# Altium PCB PCB_2020-05-19_10-20-51_2022-02-26.pcbdoc
Units mil, origin at the board's own origin, x right, y up, seen from the top; angles counter-clockwise.
Board outline 6480 x 5240 mil, 2 copper layers (Top Layer, Bottom Layer); 39 components, 37 nets, 137 pads, 2 vias.
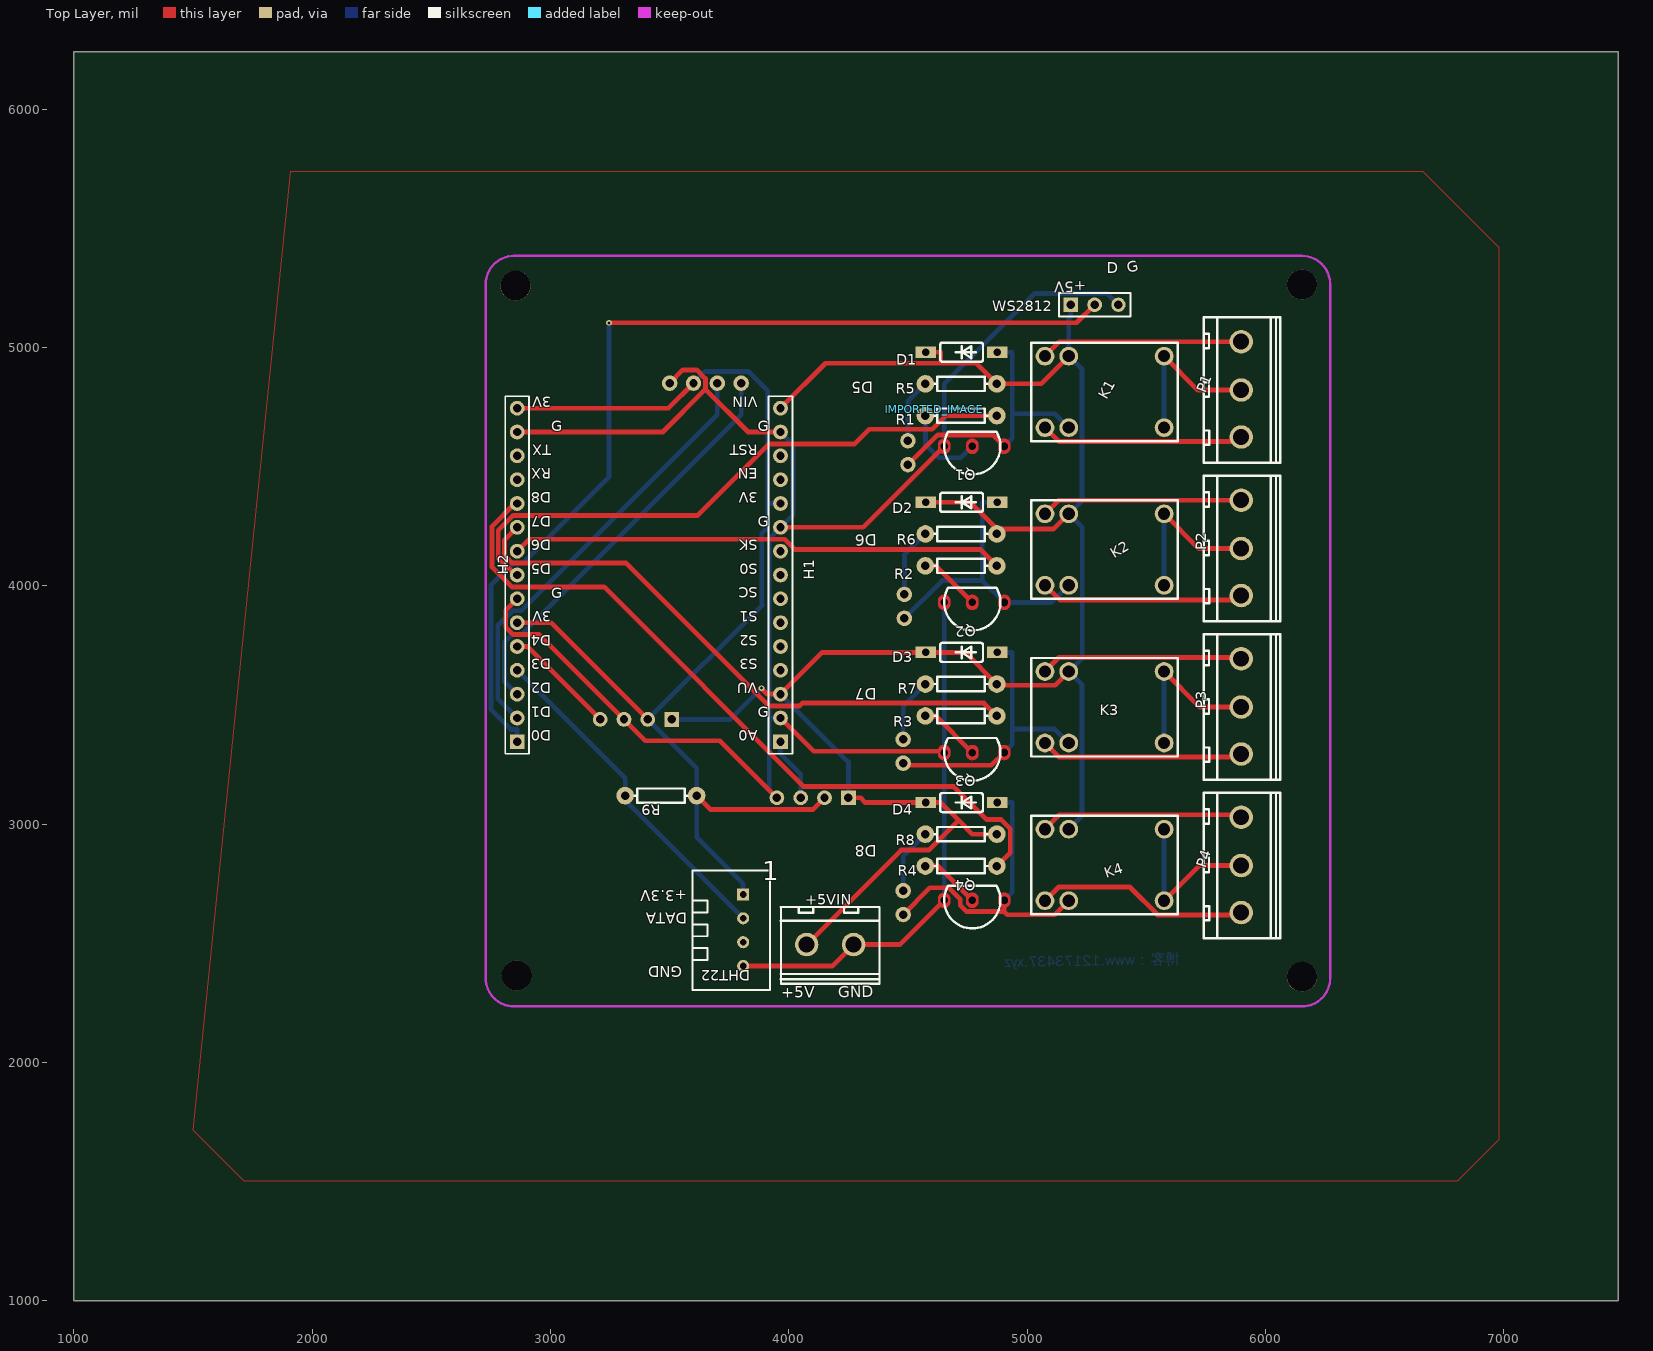
[diagram p0: Top Layer view]
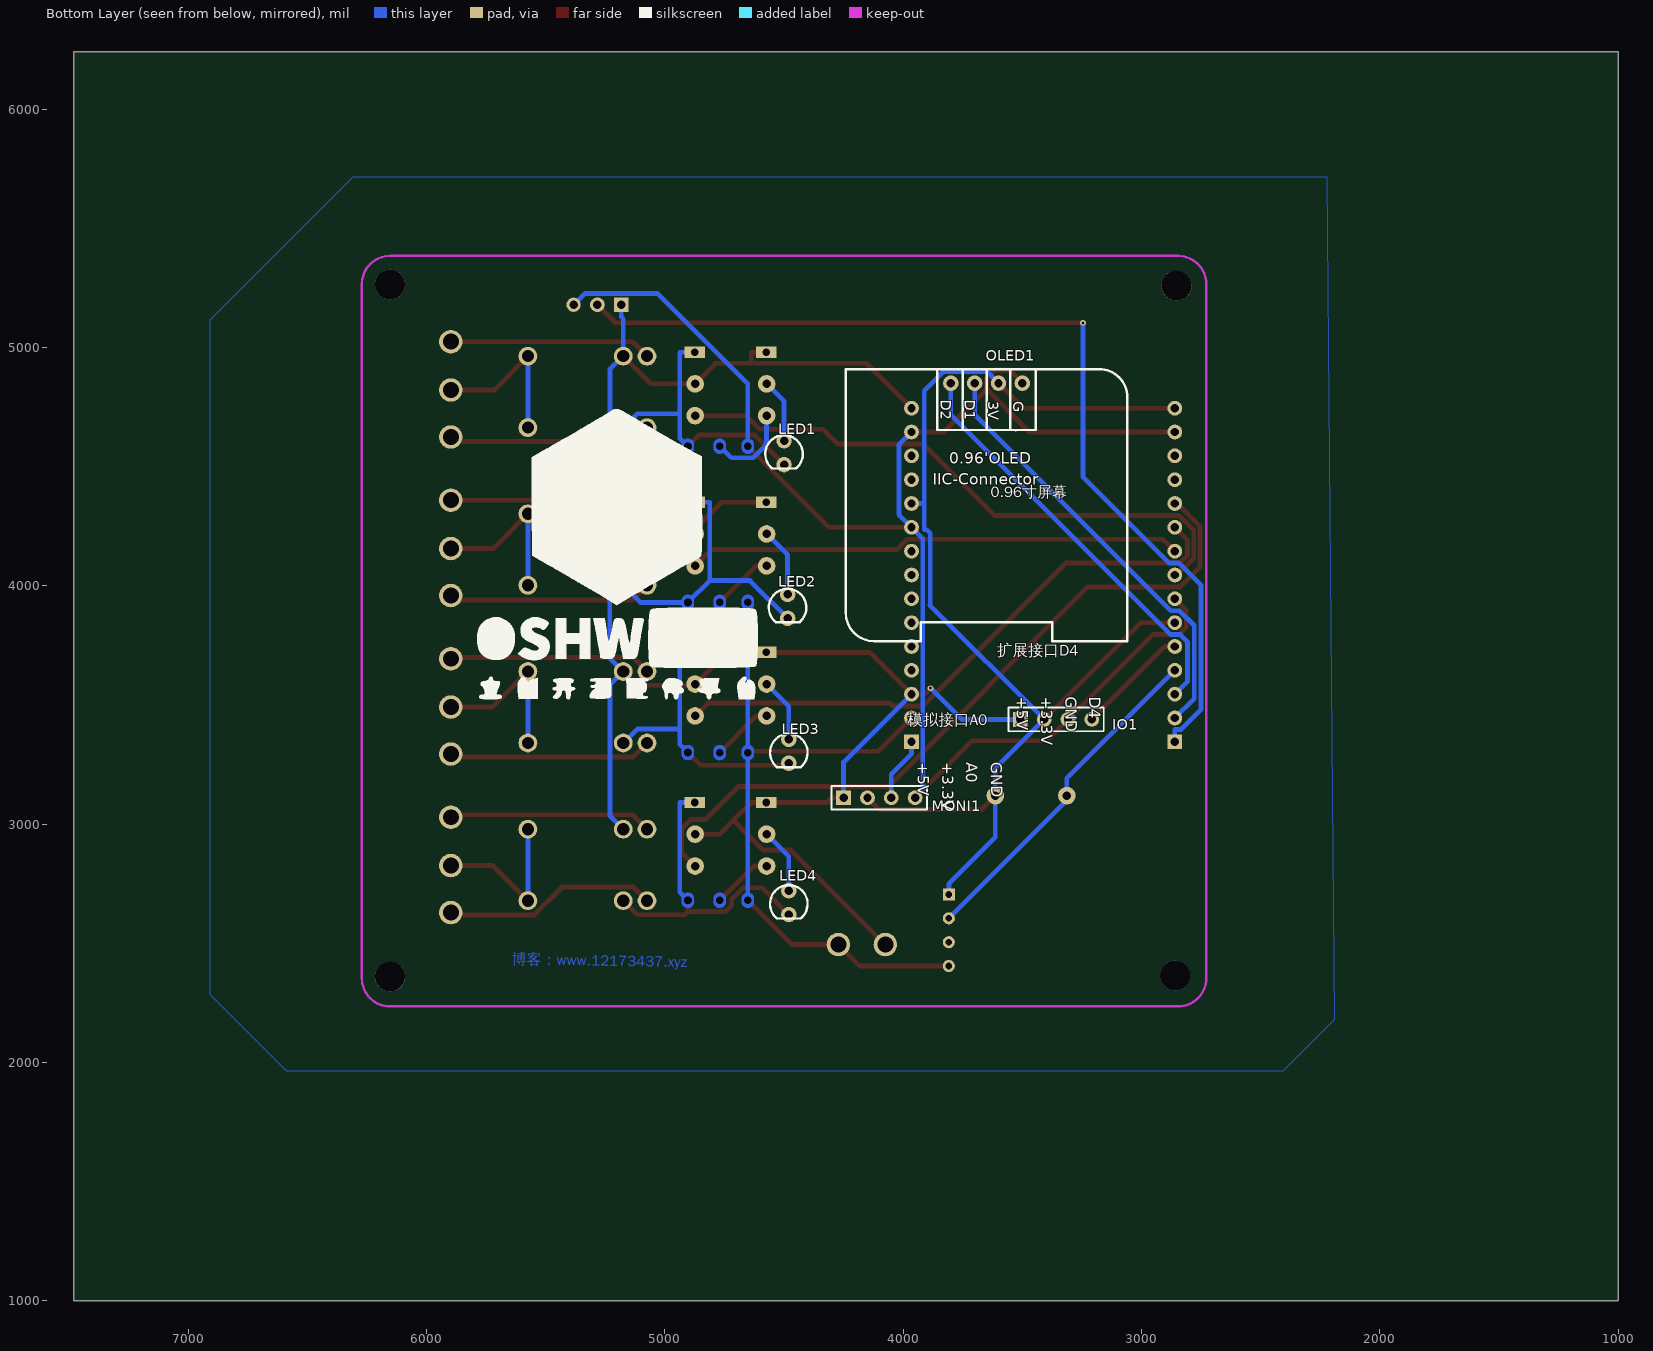
[diagram p1: Bottom Layer view, seen from below]

## Layer stack, top to bottom
Top Layer: signal copper (thickness not stored)
Dielectric: dielectric 12.6, FR-4, Dk 4.8
Bottom Layer: signal copper (thickness not stored)

## Board outline
7480,1000 1000,1000 1000,6240 7480,6240

## Components (designator, comment, footprint, x,y, rotation, side; value= is the part's Value field where it differs from the comment)
+5VIN "WJ127-5.0-2P_C187897" CONN-TH_2P-P5.00_WJ127-5.0-2P 4173.3,2494.03 r0 top
D1 "1N4148" DO35-7 4725,4980 r0 top
D2 "1N4148" DO35-7 4725,4350.03 r0 top
D3 "1N4148" DO35-7 4725,3720.06 r0 top
D4 "1N4148" DO35-7 4725,3090.09 r0 top
DHT22 "DHT22" DHT22_AM2303_VERT 3808.3,2554.03 r180 top
H1 "HDR-F-2.54_1x15" HDR-F-2.54_1X15 3965,4045 r90 top
H2 "HDR-F-2.54_1x15" HDR-F-2.54_1X15 2860,4045 r90 top
IMPORTED_IMAGE "IMPORTED_IMAGE" IMPORTED_IMAGE 4610.42,4741.44 r0 top
IO1 "HDR-F-2.54_1x4" HDR-F-2.54_1X4 3358.3,3439.03 r0 bottom
K1 "HK4100F-DC5V-SDG" RELAY-TH_HK4100F-DC5V-SDG 5325,4813.33 r0 top
K2 "HK4100F-DC5V-SDG" RELAY-TH_HK4100F-DC5V-SDG 5325,4151.66 r0 top
K3 "HK4100F-DC5V-SDG" RELAY-TH_HK4100F-DC5V-SDG 5325,3490 r0 top
K4 "HK4100F-DC5V-SDG" RELAY-TH_HK4100F-DC5V-SDG 5325,2828.33 r0 top
LED1 "LED-TH-3mm_G" LED-TH_BD3.0_GREEN 4500,4558.33 r0 bottom
LED2 "LED-TH-3mm_G" LED-TH_BD3.0_GREEN 4485,3913.33 r0 bottom
LED3 "LED-TH-3mm_G" LED-TH_BD3.0_GREEN 4480,3305.03 r0 bottom
LED4 "LED-TH-3mm_G" LED-TH_BD3.0_GREEN 4480,2670.03 r0 bottom
MONI1 "HDR-F-2.54_1x4" HDR-F-2.54_1X4 4100,3110 r0 bottom
OLED1 "0.96OLED_4P" 0.96OLED_4P 3650,4850 r0 bottom
P1 "WJ127-5.0-3P" CONN-TH_3P-P5.00_WJ127-5.0-3P 5898.3,4824.03 r90 top
P2 "WJ127-5.0-3P" CONN-TH_3P-P5.00_WJ127-5.0-3P 5898.3,4158.8 r90 top
P3 "WJ127-5.0-3P" CONN-TH_3P-P5.00_WJ127-5.0-3P 5898.3,3493.56 r90 top
P4 "WJ127-5.0-3P" CONN-TH_3P-P5.00_WJ127-5.0-3P 5898.3,2828.33 r90 top
Q1 "S8050SDB" T0-92 4770,4585 r180 top
Q2 "S8050SDB" T0-92 4770,3929.94 r180 top
Q3 "S8050SDB" T0-92 4770,3299.96 r180 top
Q4 "S8050SDB" T0-92 4770,2680 r180 top
R1 "4.7k" R_AXIAL-0.3 4723.05,4713.45 r0 top
R2 "4.7k" R_AXIAL-0.3 4723.05,4083.48 r0 top
R3 "4.7k" R_AXIAL-0.3 4723.05,3453.51 r0 top
R4 "4.7k" R_AXIAL-0.3 4723.05,2823.54 r0 top
R5 "1k" R_AXIAL-0.3 4723.05,4847.22 r0 top
R6 "1k" R_AXIAL-0.3 4723.05,4217.25 r0 top
R7 "1k" R_AXIAL-0.3 4723.05,3587.28 r0 top
R8 "1k" R_AXIAL-0.3 4723.05,2957.31 r0 top
R9 "10k" R_AXIAL-0.3 3463.3,3119.03 r180 top
WS2812 "HDR-F-2.54_1x3" HDR-F-2.54_1X3 5283.3,5179.03 r0 top
? "" ? 3413.3,5018.56 r0 top

## Footprints (in the part's own frame and the unit in brackets; to place one, negate y for a bottom-side part, rotate by r counter-clockwise, add the part's x,y. Pads: shape width x height; smd on the part's side, far side on the other; paste and mask are expansions set on the pad)
0.96OLED_4P [mm]
  round 1.65 hole 0.89: 1(3.81,0.001) 2(1.27,-0.002) 3(-1.27,-0.002) 4(-3.81,-0.002)
  silkscreen extent -15,-1.5 15,27.5
CONN-TH_2P-P5.00_WJ127-5.0-2P [mm]
  round 2.5 hole 1.7: 1(-2.504,0) 2(2.504,0)
  silkscreen extent -5.24,-4.16 5.27,4
CONN-TH_3P-P5.00_WJ127-5.0-3P [mm]
  round 2.5 hole 1.7: 1(-5.08,0) 2(-0.071,0) 3(5.08,0)
  silkscreen extent -7.82,-4.16 7.69,4
DHT22_AM2303_VERT [mil]
  rect 51x51 hole 28: 1(0,-150)
  round 51 hole 28: 2(0,-50) 3(0,50) 4(0,150)
  silkscreen extent -113,-250 213,250
DO35-7 [mil]
  rect 85.9x47.7 hole 32: A(150,0) C(-150,0)
  silkscreen extent -90,-40 90,40
HDR-F-2.54_1X3 [mil]
  rect 62x62 hole 35: 1(-100,0)
  round 62 hole 35: 2(0,0)
  round 60 hole 36: 3(100,0)
  silkscreen extent -150,-49 150,50
HDR-F-2.54_1X4 [mil]
  rect 62x62 hole 35: 1(150,0)
  round 62 hole 35: 2(50,0) 3(-50,0) 4(-150,0)
  silkscreen extent -200,-50 200,50
HDR-F-2.54_1X15 [mil]
  rect 62x62 hole 35: 1(-700,0)
  round 62 hole 35: 2(-600,0) 3(-500,0) 4(-400,0) 5(-300,0) 6(-200,0) 7(-100,0) 8(0,0) 9(100,0) 10(200,0) 11(300,0) 12(400,0) 13(500,0) 14(600,0) 15(700,0)
  silkscreen extent -750,-50 750,50
IMPORTED_IMAGE [mil]
LED-TH_BD3.0_GREEN [mil]
  round 65 hole 35.43: 1(0,-50) 2(0,50)
  silkscreen extent -79,-73 79,66
R_AXIAL-0.3 [mil]
  round 74 hole 35.4: 1(-150,0) 2(150,0)
  silkscreen extent -110,-30 110,30
RELAY-TH_HK4100F-DC5V-SDG [mm]
  round 2 hole 1.3: 1(-6.35,-3.81) 2(-3.81,-3.81) 6(6.35,-3.81) 7(6.35,3.81) 11(-3.81,3.81) 12(-6.35,3.81)
  silkscreen extent -7.8,-5.25 7.8,5.25
T0-92 [mm]
  round 0 hole 0.8: 1(3,0) 2(0,0)
  round 0 hole 0.8 slot 0.805 at 0 deg: 3(-3.394,0)
  Top Layer region: 165 vertices and 0 holes, not listed, extent -0.65,-0.8 0.65,0.8
  Top Layer region: 165 vertices and 0 holes, not listed, extent 2.35,-0.8 3.65,0.8
  Top Layer region: 165 vertices and 0 holes, not listed, extent -4.044,-0.8 -2.744,0.8
  Bottom Layer region: 165 vertices and 0 holes, not listed, extent -0.65,-0.8 0.65,0.8
  Bottom Layer region: 165 vertices and 0 holes, not listed, extent 2.35,-0.8 3.65,0.8
  Bottom Layer region: 165 vertices and 0 holes, not listed, extent -4.044,-0.8 -2.744,0.8
  silkscreen extent -3,-1.54 3,3
? [mil]

## Free pads (board coordinates)
  round 125.98 hole 125.98 unplated: ""(2853.3,5259.03) ""(2858.3,2364.03) ""(6153.3,2359.03) ""(6153.3,5264.03)

## Via types
v1: diameter 24, hole 12, Top Layer to Bottom Layer, tented both sides, 2 vias

## Nets (pads, with @x,y where several pads share a name; then routed paths per layer and width w, separated by ;. In a path a pad name is that pad's centre, name@x,y a point inside that pad or via, vN(x,y) a via of type N, cw(c..) or ccw(c..) an arc to the next point about the centre after c; other vN are vias at no path point)
1: H2.8 R1.2 | length 2516.5
  Top Layer w20: H2.8 2851.7,4045 2781,4115.7 2781,4232.8 2843.2,4295 3617.3,4295 3917.3,4595 4276.3,4595 4338.2,4656.9 4601.6,4656.9 4658.2,4713.4 R1.2
2: H2.9 R2.2 | length 2080
  Top Layer w20: H2.9 2910,4195 3983.1,4195 4025.7,4152.3 4804.2,4152.3 R2.2
3: H2.10 R3.2 | length 2495.7
  Top Layer w20: H2.10 2807.1,4192.1 2807.1,4126.5 2838.6,4095 3317.9,4095 3917.9,3495 4044.6,3495 4057.3,3507.7 4818.9,3507.7 R3.2
4: H2.11 R4.2 | length 3124.4
  Top Layer w20: H2.11 2850.8,4345 2754.9,4249.1 2754.9,4078.3 2838.2,3995 3225.7,3995 4063.5,3157.1 4692.9,3157.1 4831.5,3018.5 4890.6,3018.5 4929,2980.2 4929,2879.5 R4.2
+3.3V: DHT22.1 H1.11 H2.6 H2.15 IO1.2 MONI1.2 OLED1.3 R9.1 | length 4996.4
  Top Layer w20: H2.6 3002.3,3845 IO1.2 ; H2.15 3495,4745 OLED1.3@3600,4850 ; R9.1 3671.7,3060.6 4100.6,3060.6 MONI1.2
  Bottom Layer w20: OLED1.3@3600,4850 3649.1,4899.1 3830.5,4899.1 3912.1,4817.5 3912.1,4345 ; DHT22.1 3808.3,2749.6 3613.3,2944.6 R9.1 3613.3,3234 IO1.2 3888.2,3918.9 3886,3921.2 3886,4219.4 3901.3,4234.7 3912.1,4234.7 3912.1,4345 ; H1.11 3912.1,4345
+5V: +5VIN.1 D1.C D2.C D3.C D4.C H1.3 H1.15 IO1.1 K1.11 K2.11 K3.11 K4.11 MONI1.1 R5.2 R6.2 R7.2 R8.2 WS2812.1 | length 8495.9
  Top Layer w20: v1(3885.1,3570) 3910.1,3545 H1.3 4140.1,3720.1 D3.C 4740.3,3720.1 4873.1,3587.3 4878.1,3582.2 5117.3,3582.2 K3.11 ; H1.15 4154,4934 4638,4934 ; +5VIN.1 4471.1,2890.4 4587.4,2890.4 4712.5,3015.5 ; MONI1.1 4301.1,3110 4321,3090.1 D4.C 4638,3090.1 4712.5,3015.5 ; D2.C 4761.3,4350 R6.2@4873.1,4238.2 ; D1.C 4638,4980 4638,4934 ; R8.2 4770.8,2957.3 4712.5,3015.5 ; R6.2@4873.1,4217.2 R6.2@4873.1,4238.2 ; K2.11 5111.6,4238.2 R6.2@4873.1,4238.2 ; K1.11 5058.9,4847.2 R5.2 4786.3,4934 4638,4934
  Bottom Layer w20: IO1.1 3754.1,3439 v1(3885.1,3570) ; H1.3 4250,3260 MONI1.1 ; K4.11 5230.5,3033.8 5230.5,3584.5 K3.11 5231.3,3696.2 5231.3,4245.4 K2.11 5230.5,4357.1 5230.5,4907.8 K1.11 5175,5119.7 5183.3,5128 WS2812.1
A0: H1.1 MONI1.3 | length 270.2
  Bottom Layer w20: H1.1 3965,3293.9 4050,3208.9 MONI1.3
D1: H2.2 OLED1.2 | length 1841.2
  Bottom Layer w20: H2.2 2778.8,3526.2 2778.8,3833 2840.8,3895 2876.7,3895 3700,4718.3 OLED1.2@3700,4850
D2: H2.3 OLED1.1 | length 1761.5
  Bottom Layer w20: H2.3 2807.1,3597.9 2807.1,3765.3 2836.8,3795 2876.7,3795 3800,4718.3 OLED1.1@3800,4849.9
D2_A: D2.A K2.2 LED2.2 Q2.3 | length 1214.8
  Bottom Layer w20: LED2.2 4643.2,4021.6 4812,4021.6 ; D2.A 4812,4350 4812,4021.6 ; K2.2 5103.3,3929.9 Q2.3 4812,4021.6
D3_A: D3.A K3.2 LED3.2 Q3.3 | length 1208.2
  Top Layer w20: LED3.2 4489,3246.1 4849.7,3246.1 Q3.3
  Bottom Layer w20: D3.A 4938,3720.1 4938,3398.5 ; Q3.3 4938,3334.3 4938,3398.5 ; K3.2 5116.5,3398.5 4938,3398.5
DHT22: DHT22.2 H2.4 R9.2 | length 1433.8
  Bottom Layer w20: H2.4 3313.3,3191.7 R9.2 3313.3,3099 DHT22.2
GND: +5VIN.2 DHT22.4 H1.2 H1.10 H1.14 H2.7 H2.14 IO1.3 MONI1.4 OLED1.4 Q1.1 Q2.1 Q3.1 Q4.1 WS2812.3 | length 9672.4
  Top Layer w20: H2.7 2811.7,3896.7 2811.7,3825.9 2842.6,3795 2952.3,3795 IO1.3 3398.4,3349 3711,3349 MONI1.4 ; H2.14 3470.9,4645 3650,4824.1 ; OLED1.4@3500,4850 3555.6,4905.6 3613.5,4905.6 3650,4869.1 3650,4824.1 ; DHT22.4 4181.9,2404 +5VIN.2 4465.9,2494 Q4.1 ; H1.2 4105,3305 4646.8,3305 Q3.1 ; H1.10 4311.9,4245 Q1.1 ; H1.14 3829.1,4645 3650,4824.1
  Bottom Layer w20: MONI1.4 3917.9,3142.1 3917.9,3445 ; H1.2 3917.9,3445 ; H1.14 4017.9,4592.1 4017.9,4297.9 H1.10 3917.9,4197.9 3917.9,3445 ; Q4.1 Q3.1 Q2.1 ; Q1.1 4651.9,4848.4 5029.6,5226.1 5336.2,5226.1 WS2812.3
IO: H2.5 IO1.4 | length 475
  Top Layer w20: H2.5 2902.3,3745 IO1.4
K1_1: K1.1 P1.1 | length 855.1
  Top Layer w20: K1.1 5133,4605.3 5879.6,4605.3 P1.1
K1_6: K1.6 K1.7 P1.2 | length 682.2
  Top Layer w20: K1.7 5717.1,4821.2 P1.2
  Bottom Layer w20: K1.6 K1.7
K1_12: K1.12 P1.3 | length 848.4
  Top Layer w20: K1.12 5135.7,5024 P1.3
K4_1: K4.1 P4.1 | length 899.6
  Top Layer w20: K4.1 5132.3,2735.6 5430.4,2735.6 5547.7,2618.4 5888.3,2618.4 P4.1
K4_6: K4.6 K4.7 P4.2 | length 684.3
  Top Layer w20: K4.6 5722.2,2825.5 P4.2
  Bottom Layer w20: K4.6 K4.7
K4_12: K4.12 P4.3 | length 853
  Top Layer w20: K4.12 5135.9,3039.2 5887.4,3039.2 P4.3
P2_1: K2.1 P2.1 | length 856.6
  Top Layer w20: K2.1 5136.6,3940.1 5879.6,3940.1 P2.1
P2_2: K2.6 K2.7 P2.2 | length 683.7
  Top Layer w20: K2.7 5720.7,4156 P2.2
  Bottom Layer w20: K2.6 K2.7
P2_3: K2.12 P2.3 | length 847
  Top Layer w20: K2.12 5132.1,4358.8 P2.3
P3_1: K3.1 P3.1 | length 852.9
  Top Layer w20: K3.1 5133.9,3281.1 5885.8,3281.1 P3.1
P3_2: K3.6 K3.7 P3.2 | length 685.1
  Top Layer w20: K3.7 5724.2,3490.8 P3.2
  Bottom Layer w20: K3.6 K3.7
P3_3: K3.12 P3.3 | length 849.7
  Top Layer w20: K3.12 5133.7,3698.7 5893.1,3698.7 P3.3
Q1_2: Q1.2 R1.1 | length 360.5
  Bottom Layer w20: R1.1 4573.1,4593 4629.2,4536.9 4721.9,4536.9 Q1.2
Q1_3: D1.A K1.2 LED1.2 Q1.3 | length 1208.5
  Top Layer w20: LED1.2 4624.6,4632.9 4855.7,4632.9 Q1.3
  Bottom Layer w20: D1.A 4938,4980 4938,4721.8 ; Q1.3 4938,4619.4 4938,4721.8 ; K1.2 5116.5,4721.8 4938,4721.8
Q4_2: Q4.2 R4.1 | length 256.3
  Top Layer w20: R4.1 4626.5,2823.5 Q4.2
Q4_3: D4.A K4.2 LED4.2 Q4.3 | length 1363.1
  Top Layer w20: LED4.2 4592.4,2732.4 4671.9,2732.4 4719.7,2684.6 4719.7,2658.5 4745.9,2632.4 4903.6,2632.4 ; Q4.3 4903.6,2632.4 ; K4.2 5116,2619.3 4916.7,2619.3 4903.6,2632.4
  Bottom Layer w20: D4.A 4938,3090.1 4938,2714.4 Q4.3
R2_1: Q2.2 R2.1 | length 260.6
  Top Layer w20: R2.1 4616.5,4083.5 Q2.2
R3_1: Q3.2 R3.1 | length 260.5
  Top Layer w20: R3.1 4616.5,3453.5 Q3.2
R5_1: LED1.1 R5.1 | length 269.2
  Bottom Layer w20: LED1.1 4500,4774.2 R5.1
R6_1: LED2.1 R6.1 | length 290.4
  Bottom Layer w20: LED2.1 4485,4129.2 R6.1@4573.1,4217.2
R7_1: LED3.1 R7.1 | length 270.9
  Bottom Layer w20: LED3.1 4480,3494.2 R7.1@4573.1,3587.3
R8_1: LED4.1 R8.1 | length 275.9
  Bottom Layer w20: LED4.1 4480,2864.3 R8.1
W2812: H2.1 WS2812.2 | length 4116.5
  Top Layer w20: v1(3245.5,5103.1) 5207.3,5103.1 WS2812.2
  Bottom Layer w20: H2.1 2860,3396.1 2834.5,3396.1 2750.4,3480.1 2750.4,4003 2842.4,4095 2882.9,4095 3245.5,4457.6 v1(3245.5,5103.1)
pads on no net: DHT22.3 H1.4 H1.5 H1.6 H1.7 H1.8 H1.9 H1.12 H1.13 H2.12 H2.13

## Polygon pours and split planes (outlines as drawn)
GND on Bottom Layer (solid): 2220,5715 6310,5715 6910,5115 6910,2285 6590,1965 2405,1965 2190,2180
+5V on Top Layer (solid): 1910,5740 6660,5740 6980,5420 6980,1675 6805,1500 1715,1500 1500,1715

## Keep-outs
Keep-Out Layer:
  lines w10: 2728.3,2352.53 ccw(c2846.41,2352.53) 2846.41,2234.42 ; 2728.3,5265.92 cw(c2846.41,5265.92) 2846.41,5384.03 ; 6153.5,2234.42 ccw(c6153.5,2352.53) 6271.61,2352.53 ; 6153.5,5384.03 cw(c6153.5,5265.92) 6271.61,5265.92

## Other copper
Bottom Layer:
  text "博客：www.12173437.xyz" at 5643.3,2394.03 h78.74 r1

## Silkscreen, mask and mechanical layers (free items; w line width, h text height)
Top Overlay:
  text "+5V" at 5248.3,5294.03 h78.74 r181
  text "D" at 5333.3,5294.03 h78.74
  text "G" at 5428.3,5294.03 h78.74 r14
  text "D5" at 4355,4873.33 h80 r180
  text "3V" at 3004.1,4792.5 h45 r180
  text "VIN" at 3870,4792.5 h45 r180
  text "G" at 3004.1,4647.5 h45
  text "G" at 3870,4647.5 h45
  text "TX" at 3004.1,4592.5 h45 r180
  text "RST" at 3870,4592.5 h45 r180
  text "RX" at 3004.1,4492.5 h45 r180
  text "EN" at 3870,4492.5 h45 r180
  text "D8" at 3004.1,4392.5 h45 r180
  text "3V" at 3870,4392.5 h45 r180
  text "D7" at 3004.1,4292.5 h45 r180
  text "G" at 3870,4247.5 h45
  text "D6" at 4370,4233.33 h80 r181
  text "D6" at 3004.1,4192.5 h45 r180
  text "SK" at 3870,4192.5 h45 r180
  text "D5" at 3004.1,4092.5 h45 r180
  text "S0" at 3870,4092.5 h45 r180
  text "SC" at 3870,3992.5 h45 r180
  text "G" at 3004.1,3947.5 h45
  text "3V" at 3004.1,3892.5 h45 r180
  text "S1" at 3870,3892.5 h45 r180
  text "D4" at 3004.1,3792.5 h45 r180
  text "S2" at 3870,3792.5 h45 r180
  text "D3" at 3004.1,3692.5 h45 r180
  text "S3" at 3870,3692.5 h45 r180
  text "D2" at 3004.1,3592.5 h45 r180
  text "VU" at 3870,3592.5 h45 r180
  text "D7" at 4370,3585.78 h80 r180
  text "D1" at 3004.1,3492.5 h45 r180
  text "G" at 3870,3447.5 h45
  text "D0" at 3004.1,3392.5 h45 r180
  text "A0" at 3870,3392.5 h45 r180
  text "D8" at 4370,2928.33 h80 r180
  text "+3.3V" at 3573.3,2739.03 h78.74 r180
  text "DATA" at 3573.3,2644.03 h78.74 r180
  text "GND" at 3553.3,2419.03 h78.74 r180
  text "+5V" at 3968.3,2254.03 h80
  text "GND" at 4208.3,2254.03 h80 r1
Bottom Overlay:
  text "D1" at 3742.5,4780 h45 r90
  text "D2" at 3842.5,4780 h45 r90
  text "G" at 3537.5,4775 h45 r90
  text "3V" at 3642.5,4775 h45 r90
  text "0.96寸屏幕" at 3633.3,4354.03 h78.74
  text "扩展接口D4" at 3605,3688.33 h80
  text "D4" at 3235,3533.33 h80 r90
  text "GND" at 3336.67,3533.33 h80 r89
  text "+3.3V" at 3438.33,3533.33 h80 r90
  text "+5V" at 3540,3533.33 h80 r90
  text "模拟接口A0" at 3980,3398.33 h80
  text "GND" at 3650,3258.33 h80 r89
  text "A0" at 3751.67,3258.33 h80 r91
  text "+3.3V" at 3853.33,3258.33 h80 r90
  text "+5V" at 3955,3258.33 h80 r90
Bottom Solder:
  text "博客：www.12173437.xyz" at 5643.3,2394.03 h78.74 r1

## Text inside footprints (layer, text, board x,y; h text height)
DHT22: Top Overlay "1" at 3888.3,2764.03 h80
OLED1: Bottom Overlay "IIC-Connector" at 3876.6,4422.94 h47.24; Bottom Overlay "0.96'OLED" at 3807.4,4511.43 h47.24